# EAGLE board Alimentação (EAGLE 9.7.0)

Size 194.29 x 100.65 mm. Coordinates in mm from the lower left corner, seen from the top.
Outline: 0,0 194.29,0 194.29,100.64 0,100.64 0,0
Copper layers (1*16): Top 0.035mm / dielectric 1.5mm / Bottom 0.035mm
Design rules "default": minimum track width 6mil, minimum drill 0.35mm, track to track 6mil, track to pad 6mil, pad to pad 6mil, via to via 6mil, smd to smd 6mil, copper to edge 40mil, drill to drill 6mil, minimum pad ring 10mil, minimum via ring 8mil, stop-mask expansion 4mil, vias tented up to drill 0mil, thermal gap 10mil

## Footprints (pad centres in the part's own frame; a part is rotated, then mirrored left to right if it is on the bottom)
BATTERY-GENERIC = drill 1.118 pad 3.15 octagon: + 2.54,0; - -2.54,0
CAPPRD254W65D500H1150B = drill 0.85 pad 1.45: 1 -1.27,0; 2 1.27,0
CAP-THRU-2.54MM = drill 1.016 pad 1.88: 1 -1.27,0; 2 1.27,0
DG01D = drill 1.118 pad 3.15 octagon: + 2.54,0; - -2.54,0
TO220V = drill 1.016 long: 1 -2.54,-2.54; 2 0,-2.54; 3 2.54,-2.54

## Placement (x,y rotation side)
BAT8  9V  [BATTERY-GENERIC]  184.99,92.39 270 top
BAT9  9V  [BATTERY-GENERIC]  186.03,61.8 270 top
C1  100u  [CAPPRD254W65D500H1150B]  66.37,66.62 180 top
C2  10u  [CAPPRD254W65D500H1150B]  81.61,61.54 180 top
C3  100n  [CAP-THRU-2.54MM]  93.04,64.08 0 top
C4  100n  [CAP-THRU-2.54MM]  103.2,64.08 0 top
M1  MOTOR_DG01D  [DG01D]  74.3,15.06 270 top
M2  MOTOR_DG01D  [DG01D]  153.15,12.7 270 top
U1  LM7805_TO220V  [TO220V]  51.13,66.62 0 top

## Library data of the parts
BAT8 BAT9 C1-C4 M1 M2 U1 = Tinkercad

## Nets
BAT8+: BAT8.+ C1.1 U1.1
BAT9+: BAT8.- BAT9.+
BAT9-: BAT9.- C1.2 C2.2 C3.1 C4.1 M1.- M2.- U1.2
M1_+: C2.1 C3.2 C4.2 M1.+ M2.+ U1.3

## Tracks (layer width: path | path; a pad name or v marks a point on that pad's centre or on a via)
BAT8+  (2 unrouted)
BAT9+  (1 unrouted)
BAT9-  (7 unrouted)
M1_+  (5 unrouted)